# Altium PCB lab2_zasetskiy_buck.PcbDoc
Units mm, origin at the board's own origin, x right, y up, seen from the top; angles counter-clockwise.
Board outline 60 x 25 mm, 2 copper layers (Top Layer, Bottom Layer), stack 1.57 mm thick; 28 components, 15 nets, 77 pads, 137 vias.
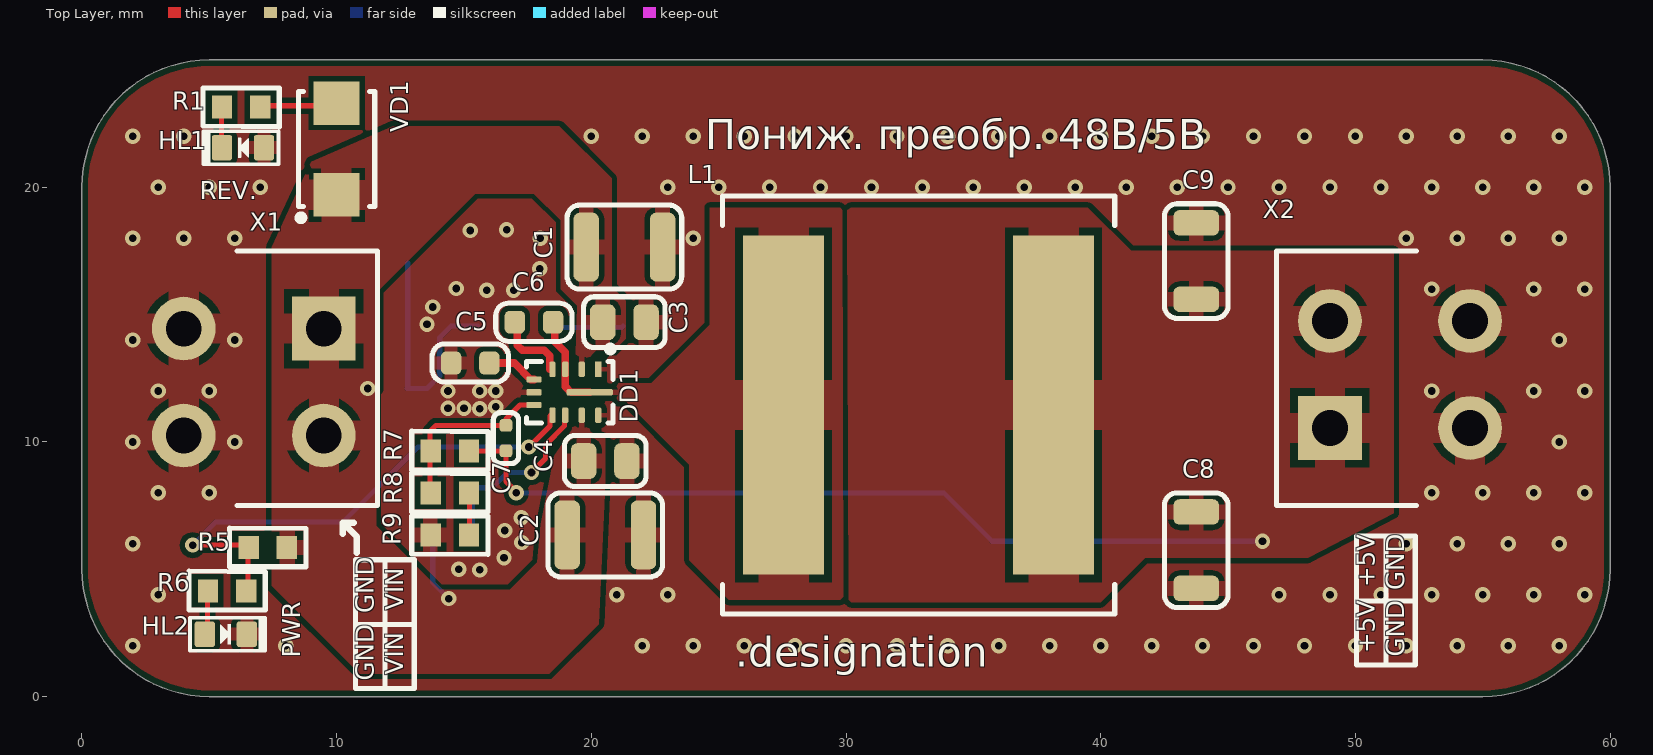
[diagram p0: Top Layer view]
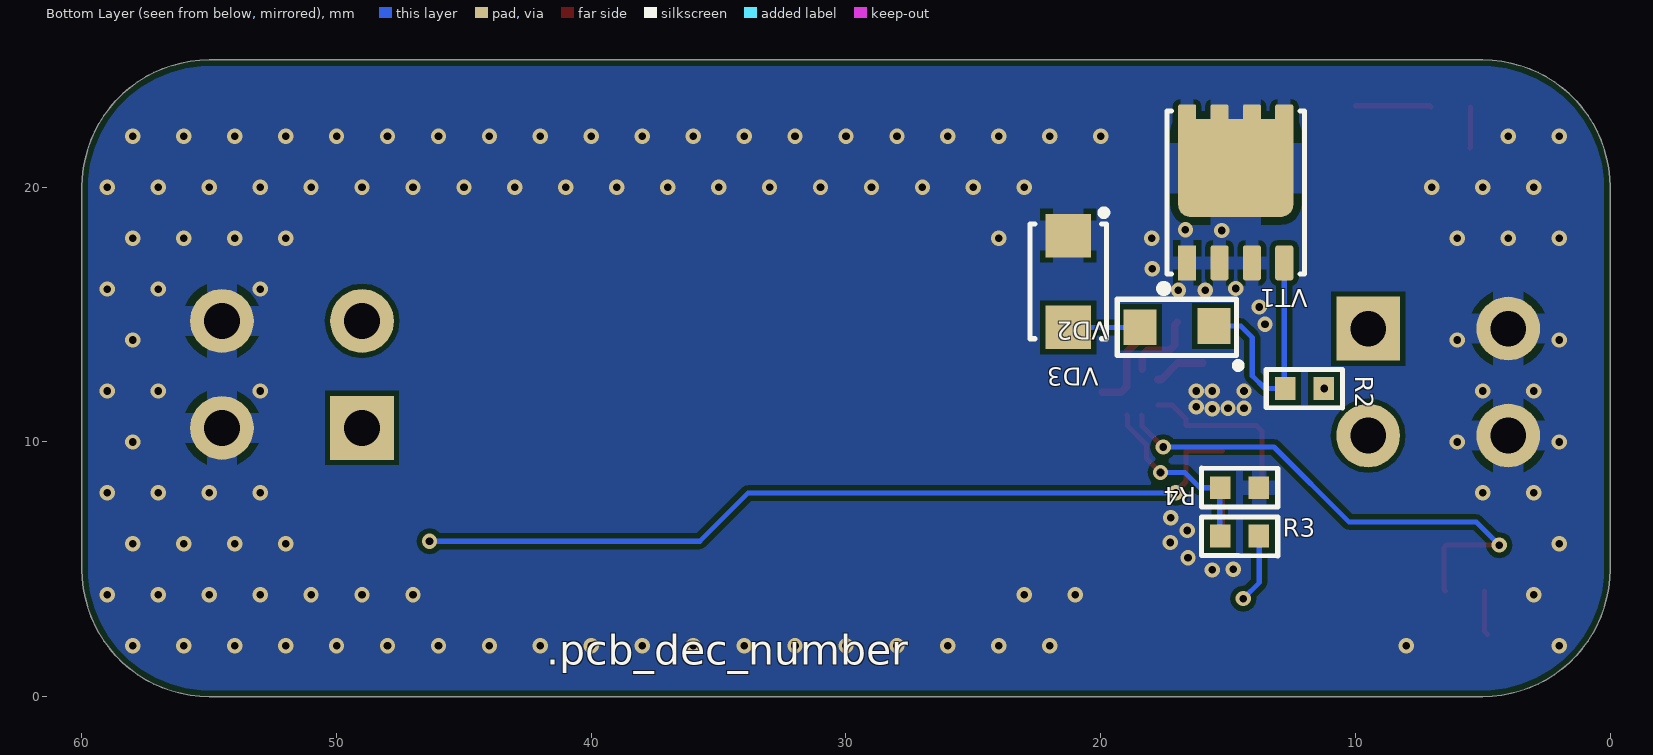
[diagram p1: Bottom Layer view, seen from below]
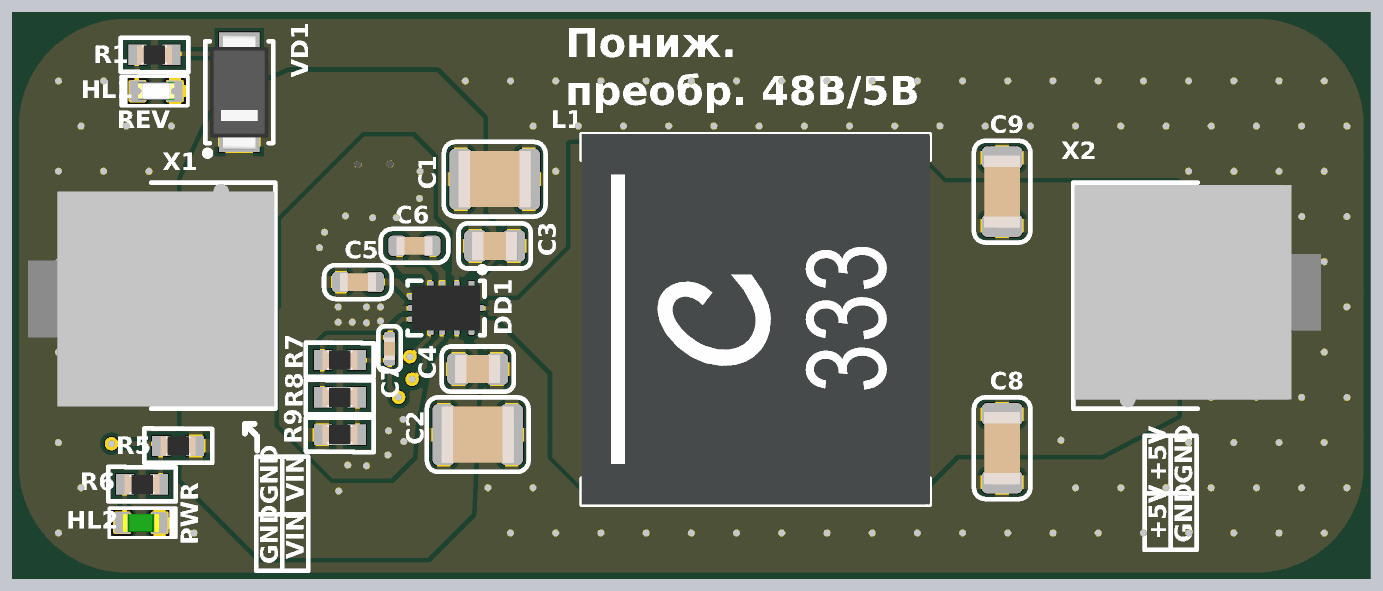
[diagram p2: 3D render of the assembled board from above, using the file's embedded part models]
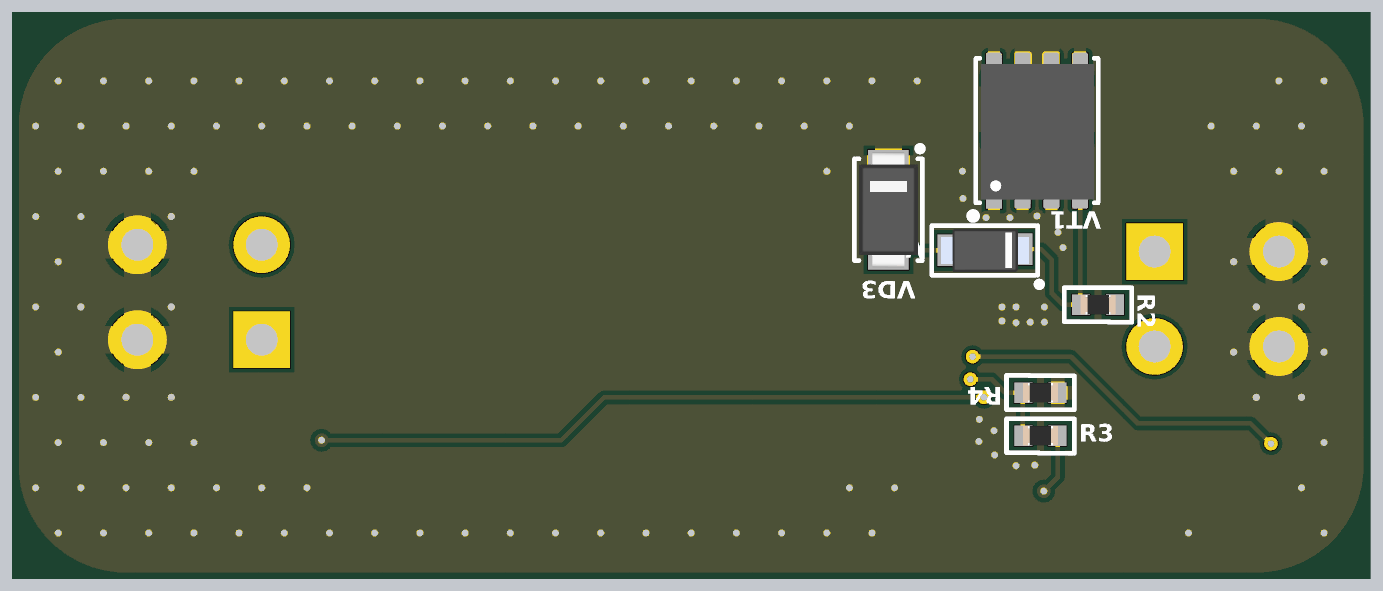
[diagram p3: 3D render of the assembled board from below, using the file's embedded part models]

## Layer stack, top to bottom
Top Solder: solder mask 0.0102, Solder Resist, Dk 3.5
Top Layer: signal copper 0.035
Core 1: core 1.5, FR4, Dk 4.6
Bottom Layer: signal copper 0.035
Bottom Solder: solder mask 0.0102, Solder Resist, Dk 3.5

## Board outline
0,5 0,20 cw(c5,20) 5,25 55,25 cw(c55,20) 60,20 60,5 cw(c55,5) 55,0 5,0 cw(c5,5)

## Design rules (kind name [scope] priority, off if disabled: settings)
AcuteAngle min_acute_angle [OnCopper] p1: minimum=3.50000000000000E+0001 checktracksonly=FALSE // Минимальный угол между примитивами топологии
BoardOutlineClearance board_outline_clearance_std [NOT (OnLayer('Bottom Overlay') OR OnLayer('Top Overlay'))] p1: gap=0.25 ignorepadtopadclearanceinfootprint=FALSE except(0: Arc-SplitContinuation Track-SplitContinuation SMDPad-SplitContinuation THPad-SplitContinuation Via-SplitContinuation Fill-SplitContinuation Poly-SplitContinuation Region-SplitContinuation Text-SplitContinuation) // Отступ элементов топологии от края фрезеруемой печатной платы
Clearance clearance_outer_35um_std [OnTopLayer OR OnBottomLayer] p1: gap=0.2 ignorepadtopadclearanceinfootprint=TRUE except(0.25: Arc-Hole Track-Hole SMDPad-Hole THPad-Hole Via-Hole Fill-Hole Poly-Hole Region-Hole Text-Hole) // Зазоры на внешних слоях
Clearance clearance_inner_35um_std [NOT (OnTopLayer Or OnBottomLayer)] p2: gap=0.2 ignorepadtopadclearanceinfootprint=FALSE except(0.25: Arc-Hole Track-Hole SMDPad-Hole THPad-Hole Via-Hole Fill-Hole Poly-Hole Region-Hole Text-Hole) // Зазоры на внутренних слоях
ComponentClearance [All] p1: gap=0 collisioncheckmode=3 verticalgap=0 showdistances=FALSE
DiffPairsRouting diff_pairs_routing [All] p1: maxlimit=0.127 minlimit=0.127 mostfreqgap=0.127 toplayer_minwidth=0.143 toplayer_maxwidth=0.143 toplayer_prefwidth=0.143 bottomlayer_minwidth=0.143 bottomlayer_maxwidth=0.143 bottomlayer_prefwidth=0.143 impedanceprofiledriven=TRUE impedanceprofileid={FD46899E-B5A2-4EF5-A302-5D2DB6A51F35} maxuncoupledlength=12.7 // Правила трассировки дифференциальных пар
HoleSize min_hole_size_std [IsPad] p1: absolutevalues=TRUE maxlimit=5.9 minlimit=0.6 maxpercent=80.000 minpercent=20.000 // Диаметр межслойного переходного отверстия
HoleSize min_hole_size_via_std [IsVia] p2: absolutevalues=TRUE maxlimit=5.9 minlimit=0.3 maxpercent=80.000 minpercent=20.000 // Минимальный диаметр монтажного отверстия
HoleToHoleClearance hole_to_hole_clearance_std [All] p1: gap=0.2 allowstackedmicrovias=FALSE // Минимальное расстояние между краями двух отверстий
MinimumAnnularRing min_via_ar_std [All] p1: minimumring=0.15 // Поясок площадки переходного отверстия (Annular ring VIA)
MinimumAnnularRing min_pad_ar_std [All] p2: minimumring=0.2 // Поясок монтажной контактной площадки (Annular ring PAD)
MinimumSolderMaskSliver min_solder_mask_bridge_std [All] p1: minsoldermaskwidth=0.15 // Мнимальная ширина масочного мостика
PlaneClearance plane_clearance_35um_std [All] p1: clearance=0.2 // Отступ полигона (для слоя plane) от элементов топологии
PlaneConnect [All] p1: planeconnectstyle=Relief reliefexpansion=0.5 reliefentries=4 reliefconductorwidth=0.2 reliefairgap=0.2
PolygonConnect poly_connect_to_pad<=0.3 [(AsMM(PadXSize_AllLayers)<=0.301) or (AsMM(PadYSize_AllLayers)<=0.301)] p1: thpad.connectstyle=Relief thpad.reliefconductorwidth=0.2 thpad.reliefentries=4 thpad.polygonreliefangle="90 Angle" thpad.airgapwidth=0.2 smdpad.connectstyle=Relief smdpad.reliefconductorwidth=0.2 smdpad.reliefentries=4 smdpad.polygonreliefangle="90 Angle" smdpad.airgapwidth=0.2 via.connectstyle=Direct via.reliefconductorwidth=0.254 via.reliefentries=4 via.polygonreliefangle="90 Angle" via.airgapwidth=0.254 // Правила подключения полигонов для падов от 0,3мм и меньше
PolygonConnect poly_connect_to_pad<=0.4 [(AsMM(PadXSize_AllLayers)<=0.401) or (AsMM(PadYSize_AllLayers)<=0.401)] p2: thpad.connectstyle=Relief thpad.reliefconductorwidth=0.26 thpad.reliefentries=4 thpad.polygonreliefangle="90 Angle" thpad.airgapwidth=0.2 smdpad.connectstyle=Relief smdpad.reliefconductorwidth=0.26 smdpad.reliefentries=4 smdpad.polygonreliefangle="90 Angle" smdpad.airgapwidth=0.2 via.connectstyle=Direct via.reliefconductorwidth=0.254 via.reliefentries=4 via.polygonreliefangle="90 Angle" via.airgapwidth=0.254 // Правила подключения полигонов для падов от 0,4 и меньше
PolygonConnect poly_connect_to_pad<=0.6 [(AsMM(PadXSize_AllLayers)<=0.601) or (AsMM(PadYSize_AllLayers)<=0.601)] p3: thpad.connectstyle=Relief thpad.reliefconductorwidth=0.33 thpad.reliefentries=4 thpad.polygonreliefangle="90 Angle" thpad.airgapwidth=0.2 smdpad.connectstyle=Relief smdpad.reliefconductorwidth=0.33 smdpad.reliefentries=4 smdpad.polygonreliefangle="90 Angle" smdpad.airgapwidth=0.2 via.connectstyle=Direct via.reliefconductorwidth=0.254 via.reliefentries=4 via.polygonreliefangle="90 Angle" via.airgapwidth=0.254 // Правила подключения полигонов для падов от 0,6мм и меньше
PolygonConnect poly_connect_to_pad<=0.7 [(AsMM(PadXSize_AllLayers)<=0.701) or (AsMM(PadYSize_AllLayers)<=0.701)] p4: thpad.connectstyle=Relief thpad.reliefconductorwidth=0.46 thpad.reliefentries=4 thpad.polygonreliefangle="90 Angle" thpad.airgapwidth=0.2 smdpad.connectstyle=Relief smdpad.reliefconductorwidth=0.46 smdpad.reliefentries=4 smdpad.polygonreliefangle="90 Angle" smdpad.airgapwidth=0.2 via.connectstyle=Direct via.reliefconductorwidth=0.254 via.reliefentries=4 via.polygonreliefangle="90 Angle" via.airgapwidth=0.254 // Правила подключения полигонов для падов от 0,7мм и меньше
PolygonConnect poly_connect_to_pad<=0.8 [(AsMM(PadXSize_AllLayers)<=0.8)or(AsMM(PadYSize_AllLayers)<=0.8)] p5: thpad.connectstyle=Relief thpad.reliefconductorwidth=0.53 thpad.reliefentries=4 thpad.polygonreliefangle="90 Angle" thpad.airgapwidth=0.3 smdpad.connectstyle=Relief smdpad.reliefconductorwidth=0.53 smdpad.reliefentries=4 smdpad.polygonreliefangle="90 Angle" smdpad.airgapwidth=0.2 via.connectstyle=Direct via.reliefconductorwidth=0.254 via.reliefentries=4 via.polygonreliefangle="90 Angle" via.airgapwidth=0.254 // Правила подключения полигонов для падов от 0,8мм и меньше
PolygonConnect poly_connect_to_pad<=1 [(AsMM(PadXSize_AllLayers)<=1.01)or(AsMM(PadYSize_AllLayers)<=1.01)] p6: thpad.connectstyle=Relief thpad.reliefconductorwidth=0.6 thpad.reliefentries=4 thpad.polygonreliefangle="90 Angle" thpad.airgapwidth=0.3 smdpad.connectstyle=Relief smdpad.reliefconductorwidth=0.6 smdpad.reliefentries=4 smdpad.polygonreliefangle="90 Angle" smdpad.airgapwidth=0.2 via.connectstyle=Direct via.reliefconductorwidth=0.254 via.reliefentries=4 via.polygonreliefangle="90 Angle" via.airgapwidth=0.254 // Правила подключения полигонов для падов от 1мм и меньше
PolygonConnect poly_connect_to_pad<=1.3 [(AsMM(PadXSize_AllLayers)<=1.31)or(AsMM(PadYSize_AllLayers)<=1.31)] p7: thpad.connectstyle=Relief thpad.reliefconductorwidth=0.66 thpad.reliefentries=4 thpad.polygonreliefangle="90 Angle" thpad.airgapwidth=0.3 smdpad.connectstyle=Relief smdpad.reliefconductorwidth=0.86 smdpad.reliefentries=4 smdpad.polygonreliefangle="90 Angle" smdpad.airgapwidth=0.2 via.connectstyle=Direct via.reliefconductorwidth=0.254 via.reliefentries=4 via.polygonreliefangle="90 Angle" via.airgapwidth=0.254 // Правила подключения полигонов для падов от 1,3мм и меньше
PolygonConnect poly_connect_to_pad<=1.6 [(AsMM(PadXSize_AllLayers)<=1.61)or(AsMM(PadYSize_AllLayers)<=1.61)] p8: thpad.connectstyle=Relief thpad.reliefconductorwidth=0.8 thpad.reliefentries=4 thpad.polygonreliefangle="90 Angle" thpad.airgapwidth=0.3 smdpad.connectstyle=Relief smdpad.reliefconductorwidth=1 smdpad.reliefentries=4 smdpad.polygonreliefangle="90 Angle" smdpad.airgapwidth=0.2 via.connectstyle=Direct via.reliefconductorwidth=0.254 via.reliefentries=4 via.polygonreliefangle="90 Angle" via.airgapwidth=0.254 // Правила подключения полигонов для падов от 1,6мм и меньше
PolygonConnect poly_connect_to_pad<=1.8 [(AsMM(PadXSize_AllLayers)<=1.8)or(AsMM(PadYSize_AllLayers)<=1.8)] p9: thpad.connectstyle=Relief thpad.reliefconductorwidth=1 thpad.reliefentries=4 thpad.polygonreliefangle="90 Angle" thpad.airgapwidth=0.3 smdpad.connectstyle=Relief smdpad.reliefconductorwidth=1.2 smdpad.reliefentries=4 smdpad.polygonreliefangle="90 Angle" smdpad.airgapwidth=0.2 via.connectstyle=Direct via.reliefconductorwidth=0.254 via.reliefentries=4 via.polygonreliefangle="90 Angle" via.airgapwidth=0.254 // Правила подключения полигонов для падов от 1,8мм и меньше
PolygonConnect poly_connect_to_pad<=2 [(AsMM(PadXSize_AllLayers)<=2.01)or(AsMM(PadYSize_AllLayers)<=2.01)] p10: thpad.connectstyle=Relief thpad.reliefconductorwidth=1.1 thpad.reliefentries=4 thpad.polygonreliefangle="90 Angle" thpad.airgapwidth=0.3 smdpad.connectstyle=Relief smdpad.reliefconductorwidth=1.4 smdpad.reliefentries=4 smdpad.polygonreliefangle="90 Angle" smdpad.airgapwidth=0.2 via.connectstyle=Direct via.reliefconductorwidth=0.254 via.reliefentries=4 via.polygonreliefangle="90 Angle" via.airgapwidth=0.254 // Правила подключения полигонов для падов от 2мм и меньше
PolygonConnect poly_connect_to_pad<=2.3 [(AsMM(PadXSize_AllLayers)<=2.31)or(AsMM(PadYSize_AllLayers)<=2.31)] p11: thpad.connectstyle=Relief thpad.reliefconductorwidth=1.2 thpad.reliefentries=4 thpad.polygonreliefangle="90 Angle" thpad.airgapwidth=0.3 smdpad.connectstyle=Relief smdpad.reliefconductorwidth=1.4 smdpad.reliefentries=4 smdpad.polygonreliefangle="90 Angle" smdpad.airgapwidth=0.2 via.connectstyle=Direct via.reliefconductorwidth=0.254 via.reliefentries=4 via.polygonreliefangle="90 Angle" via.airgapwidth=0.254 // Правила подключения полигонов для падов от 2,3мм и меньше
PolygonConnect poly_connect_to_pad<=2.5 [(AsMM(PadXSize_AllLayers)<=2.51)or(AsMM(PadYSize_AllLayers)<=2.51)] p12: thpad.connectstyle=Relief thpad.reliefconductorwidth=1.2 thpad.reliefentries=4 thpad.polygonreliefangle="90 Angle" thpad.airgapwidth=0.3 smdpad.connectstyle=Relief smdpad.reliefconductorwidth=1.4 smdpad.reliefentries=4 smdpad.polygonreliefangle="90 Angle" smdpad.airgapwidth=0.2 via.connectstyle=Direct via.reliefconductorwidth=0.254 via.reliefentries=4 via.polygonreliefangle="90 Angle" via.airgapwidth=0.254 // Правила подключения полигонов для падов от 2,5мм и меньше
PolygonConnect poly_connect_to_pad<=2.7 [(AsMM(PadXSize_AllLayers)<=2.71)or(AsMM(PadYSize_AllLayers)<=2.71)] p13: thpad.connectstyle=Relief thpad.reliefconductorwidth=1.4 thpad.reliefentries=4 thpad.polygonreliefangle="90 Angle" thpad.airgapwidth=0.3 smdpad.connectstyle=Relief smdpad.reliefconductorwidth=1.6 smdpad.reliefentries=4 smdpad.polygonreliefangle="90 Angle" smdpad.airgapwidth=0.2 via.connectstyle=Direct via.reliefconductorwidth=0.254 via.reliefentries=4 via.polygonreliefangle="90 Angle" via.airgapwidth=0.254 // Правила подключения полигонов для падов от 2,7мм и меньше
PolygonConnect poly_connect_to_pad<=3 [(AsMM(PadXSize_AllLayers)<=3.01)or(AsMM(PadYSize_AllLayers)<=3.01)] p14: thpad.connectstyle=Relief thpad.reliefconductorwidth=1.6 thpad.reliefentries=4 thpad.polygonreliefangle="90 Angle" thpad.airgapwidth=0.3 smdpad.connectstyle=Relief smdpad.reliefconductorwidth=1.8 smdpad.reliefentries=4 smdpad.polygonreliefangle="90 Angle" smdpad.airgapwidth=0.2 via.connectstyle=Direct via.reliefconductorwidth=0.254 via.reliefentries=4 via.polygonreliefangle="90 Angle" via.airgapwidth=0.254 // Правила подключения полигонов для падов от 3мм и меньше
PolygonConnect poly_connect_to_pad<=7 [(AsMM(PadXSize_AllLayers)<7.01)or(AsMM(PadYSize_AllLayers)<=7.01)] p15: thpad.connectstyle=Relief thpad.reliefconductorwidth=2 thpad.reliefentries=4 thpad.polygonreliefangle="90 Angle" thpad.airgapwidth=0.4 smdpad.connectstyle=Relief smdpad.reliefconductorwidth=2 smdpad.reliefentries=4 smdpad.polygonreliefangle="90 Angle" smdpad.airgapwidth=0.3 via.connectstyle=Direct via.reliefconductorwidth=0.254 via.reliefentries=4 via.polygonreliefangle="90 Angle" via.airgapwidth=0.254 // Правила подключения полигонов для падов от 7мм и меньше
PolygonConnect poly_connect_to_pad [All] p16: thpad.connectstyle=Relief thpad.reliefconductorwidth=0.25 thpad.reliefentries=4 thpad.polygonreliefangle="90 Angle" thpad.airgapwidth=0.2 smdpad.connectstyle=Relief smdpad.reliefconductorwidth=0.25 smdpad.reliefentries=4 smdpad.polygonreliefangle="90 Angle" smdpad.airgapwidth=0.2 via.connectstyle=Direct via.reliefconductorwidth=0.25 via.reliefentries=4 via.polygonreliefangle="90 Angle" via.airgapwidth=0.2 // Правила подключения полигонов общие
RoutingCorners [All] p1 off: cornerstyle=45-Degree minsetback=2.5 maxsetback=2.5
RoutingVias [All] p1: holewidth=0.3 width=0.6 viastyle="Through Hole" minholewidth=0.3 minwidth=0.6 maxholewidth=5.9 maxwidth=6.4
SilkToSilkClearance silk_to_silk_clearance_std [All] p1 off: silktosilkclearance=0.15 // Отступ текста шелкографии от других примитивов шелкографии
SilkToSolderMaskClearance silk_to_solder_mask_clearance_std [IsPad] p1 off: minsilkscreentomaskgap=0.15 clearancetoexposedcopper=FALSE // Минимальное расстояние между элементами шелкографии и вскрытой медью
SolderMaskExpansion solder_mask_expansion_std [All] p1: expansion=0.05 // Припуск паяльной масски
UnRoutedNet [All] p1: checkbadconnections=TRUE
Width width_35um_std [All] p1: maxlimit=10 minlimit=0.2 preferedwidth=0.2 checkconnectedcopper=TRUE // Ширина проводников (общая)
19 further rules are at their usual default settings.

## Components (designator, comment, footprint, x,y, rotation, side; value= is the part's Value field where it differs from the comment)
C1 "4,7 мк" C1210 21.3,17.65 r0 top
C2 "4,7 мк" C1210 20.55,6.35 r0 top
C3 "0,22 мк" C0805 21.3,14.7 r0 top
C4 "0,22 мк" C0805 20.55,9.25 r0 top
C5 "1 мк" C0603 15.25,13.1 r180 top
C6 "0,1 мк" C0603 17.75,14.7 r180 top
C7 "27" C0402 16.65,10.15 r90 top
C8 "22 мк" C1206 43.75,5.75 r270 top
C9 "22 мк" C1206 43.75,17.1 r90 top
DD1 "LMR36015FSCQRNXRQ1" VQFN-HR-12 19.15,11.95 r270 top
HL1 "VLMB1300-GS08" LED 6.325,21.55 r180 top
HL2 "TLMG1100-GS08" LED_GREEN 5.65,2.45 r0 top
L1 "XAL1510-682MEB" XAL-2-1620X1520X1100 32.85,11.45 r0 top
R1 "4,3 к" R0603 6.25,23.15 r0 top
R2 "2,2 к" R0603 12,12.1 r180 bottom
R3 "330 к" R0603 14.55,6.3 r180 bottom
R4 "10,2 к" R0603 14.55,8.2 r0 bottom
R5 "100 к" R0603 7.3,5.85 r180 top
R6 "2,4 к" R0603 5.7,4.15 r180 top
R7 "100 к" R0603 14.45,9.65 r180 top
R8 "12 к" R0603 14.45,8 r180 top
R9 "13 к" R0603 14.45,6.35 r0 top
VD1 "SL13-E3/5AT" DO-214AC 10,21.5 r90 top
VD2 "BZD17C47P" DO-219AB 17,14.5 r0 bottom
VD3 "SL13-E3/5AT" DO-214AC 21.275,16.3 r270 bottom
VT1 "CSD19532Q5B" SON-8 14.7,19.8 r180 bottom
X1 "4-1775099-0" 4-1775099-0 6.1,12.5 r270 top
X2 "4-1775099-0" 4-1775099-0 52.4,12.5 r90 top

## Footprints (in the part's own frame and the unit in brackets; to place one, negate y for a bottom-side part, rotate by r counter-clockwise, add the part's x,y. Pads: shape width x height; smd on the part's side, far side on the other; paste and mask are expansions set on the pad)
4-1775099-0 [mm]
  rect 2.5x2.5 hole 1.4: 1(-1.95,3.4)
  round 2.5 hole 1.4: 2(2.25,3.4) 3(-1.95,-2.1) 4(2.25,-2.1)
  silkscreen extent -5,0 5,5.5, body extent -4.95,-5.45 4.9,5.45, height 12.8
C0402 [mm] "Chip Capacitor, 2-Leads, Body 1,00x0,50mm, IPC Medium Density"
  rrect50% 0.5x0.5 smd: 1(-0.5,0) 2(0.5,0)
  silkscreen extent -1,-0.5 1,0.5, body extent -0.5,-0.25 0.5,0.25, height 0.5
C0603 [mm] "Chip Capacitor, 2-Leads, Body 1,60x0,80mm, IPC Medium Density"
  rrect50% 0.8x0.9 smd: 1(-0.75,0) 2(0.75,0)
  silkscreen extent -1.5,-0.75 1.5,0.75, body extent -0.8,-0.4 0.8,0.4, height 0.8
C0805 [mm] "Chip Capasitor, 2-Leads, Body 2,00x1,25mm, IPC Medium Density"
  rrect50% 1x1.4 smd: 1(-0.85,0) 2(0.85,0)
  silkscreen extent -1.6,-1 1.6,1, body extent -1,-0.62 1,0.63, height 0.6
C1206 [mm] "Chip Capacitor, 2-Leads, Body 3,20x1,60mm, IPC Medium Density"
  rrect50% 1x1.8 smd: 1(-1.5,0) 2(1.5,0)
  silkscreen extent -2.25,-1.25 2.25,1.25, body extent -1.6,-0.8 1.6,0.8, height 0.78
C1210 [mm] "Chip Capacitor, 2-Leads, Body 3,20x2,50mm, IPC Medium Density"
  rrect50% 1x2.7 smd: 1(-1.5,0) 2(1.5,0)
  silkscreen extent -2.25,-1.65 2.25,1.65, body extent -1.6,-1.25 1.6,1.25, height 0.78
DO-214AC [mm] "Molded Diode, 2-Leads, Body 4,25x2,67mm, IPC Medium Density"
  rect 1.7x1.8 smd: 1(-1.8,0) 2(1.8,0)
  silkscreen extent -2.82,-1.5 2.25,1.52, body extent -2.55,-1.3 2.55,1.3, height 2.26
DO-219AB [mm]
  rect 1.3x1.4 smd: 1(-1.45,-0.05) 2(1.45,0)
  silkscreen extent -2.45,-1.1 2.35,1.55, body extent -1.95,-0.95 1.95,0.95, height 1.25
LED [mm] "LED"
  rrect25% 0.8x1 smd paste-10 mask+0.1: 1(-0.825,0) 2(0.825,0)
  silkscreen extent -1.4,-0.65 1.55,0.65, body extent -0.81,-0.4 0.81,0.4, height 0.6
LED_GREEN [mm] "Green LED"
  rrect25% 0.8x1 smd paste-10 mask+0.1: 1(-0.825,0) 2(0.825,0)
  silkscreen extent -1.4,-0.65 1.55,0.65, body extent -0.8,-0.4 0.8,0.4, height 0.8
R0603 [mm] "Chip Resistor, 2-Leads, Body 1,60x0,80mm, IPC Medium Density"
  rect 0.8x0.9 smd: 1(-0.75,0) 2(0.75,0)
  silkscreen extent -1.5,-0.77 1.5,0.75, body extent -0.77,-0.43 0.78,0.43, height 0.43
SON-8 [mm]
  rrect25% 0.71x1.372 smd paste-10: D(-1.905,2.77) D(-0.635,2.77) D(0.635,2.77) D(1.905,2.77)
  rrect25% 4.52x3.85 smd paste-10: D(0,0.95)
  rrect25% 0.71x1.372 smd paste-0.002: G(1.905,-2.77) S(-0.635,-2.77) S(0.635,-2.77)
  rect 0.71x1.372 smd paste-0.002: S(-1.905,-2.77)
  silkscreen extent -2.83,-3.78 2.7,3.2, body extent -2.48,-3.06 2.52,2.94, height 1.05
VQFN-HR-12 [mm]
  rect 0.6x0.25 smd: 1(-0.9,1.125)
  rrect50% 0.6x0.25 smd: 2(-0.9,0.475) 3(-0.9,-0.175) 4(-0.9,-0.675) 8(0.9,-0.675) 9(0.9,-0.175) 10(0.9,0.475) 11(0.9,1.125)
  rrect50% 0.25x0.6 smd: 5(-0.5,-1.4) 6(0,-1.4) 7(0.5,-1.4)
  rrect50% 0.25x1.825 smd: 12(0,0.789)
  silkscreen extent -1.82,-1.7 1.2,1.73, body extent -1,-1.5 1,1.5, height 1
XAL-2-1620X1520X1100 [mm] "Precision Wire Wound Inductor, 2-Leads, Body 16,20x15,20mm, IPC Medium Density"
  rect 3.18x13.3 smd: 1(-5.3,0) 2(5.3,0)
  silkscreen extent -7.7,-8.2 7.7,8.2, body extent -7.7,-8.2 7.7,8.2, height 10.7

## Part data
C1 C2: library part c0119, "=Описание", HelpURL=http://product.samsungsem.com/mlcc/CL32B475KCIZNW.do, ID=c0119, Корпус=1210, Наименование=CL32B475KCIZNWE, Напряжение="100 В", Номинал="4,7 мк", Номинальное напряжение="100 В", Описание="Конденсатор чип 1210 4,7 мкФ 100 В ±10 %", Отклонение="±10 %", Производитель="Samsung electro-mechanics", Рабочие температуры="от –55 °С до +125 °С", Температурный коэффициент емкости=X7R, Фамилия=Засецкий
C3 C4: library part c0120, "=Описание", HelpURL=http://product.samsungsem.com/mlcc/CL21B224KCFSFN.do, ID=c0120, Корпус=0805, Наименование=CL21B224KCFSFNE, Напряжение="100 В", Номинал="0,22 мк", Номинальное напряжение="100 В", Описание="Конденсатор чип 0805 0,22 мкФ 100 В ±10 %", Отклонение="±10 %", Производитель="Samsung electro-mechanics", Рабочие температуры="от –55 °С до +125 °С", Температурный коэффициент емкости=X7R, Фамилия=Засецкий
C5: library part c0063, "=Описание", HelpURL=https://www.yageo.com/upload/media/product/products/datasheet/mlcc/UPY-GPHC_X7R_6.3V-to-50V_20.pdf, ID=c0063, Корпус=0603, Наименование=CC0603KRX7R7BB105, Напряжение="16 В", Номинал="1 мк", Номинальное напряжение="16 В", Описание="Конденсатор чип 0603 1 мкФ 16 В ±10 %", Отклонение="±10 %", Производитель="YAGEO Corp.", Рабочие температуры="от –55 °С до +125 °С", Температурный коэффициент емкости=X7R, Фамилия=Паньков
C6: library part c0033, "=Описание", HelpURL=https://www.yageo.com/upload/media/product/products/datasheet/mlcc/UPY-GPHC_X7R_6.3V-to-50V_20.pdf, ID=c0033, Корпус=0603, Наименование=CC0603KRX7R8BB104, Напряжение="25 В", Номинал="0,1 мк", Номинальное напряжение="25 В", Описание="Конденсатор чип 0603 100 нФ 25 В ±10 %", Отклонение="±10 %", Производитель="YAGEO Corp.", Рабочие температуры="от –55 °С до +125 °С", Температурный коэффициент емкости=X7R, Фамилия=Паньков
C7: library part c0001, "=Описание", HelpURL=http://product.samsungsem.com/mlcc/CL05C270JB5NNN.do, ID=c0001, Корпус=0402, Наименование=CL05C270JB5NNNC, Напряжение="50 В", Номинал=27, Номинальное напряжение="50 В", Описание="Конденсатор чип 0402 27 пФ 50 В ±5 %", Отклонение="±5 %", Производитель="Samsung electro-mechanics", Рабочие температуры="от –55 °С до +125 °С", Температурный коэффициент емкости=C0G, Фамилия=Соколов
C8 C9: library part c0102, "=Описание", HelpURL=https://www.yageo.com/upload/media/product/productsearch/datasheet/mlcc/UPY-GPHC_X7R_6.3V-to-50V_20.pdf, ID=c0102, Корпус=1206, Наименование=CC1206KRX7R6BB226, Напряжение="10 В", Номинал="22 мк", Номинальное напряжение="10 В", Описание="Конденсатор чип 0603 22 мкФ 10 В ±10 %", Отклонение="±10 %", Производитель="YAGEO Corp.", Рабочие температуры="от –55 °С до +125 °С", Температурный коэффициент емкости=X7R, Фамилия=Паньков
DD1: library part dd0011, "=Описание", HelpURL=https://www.ti.com/product/LMR36015-Q1, ID=dd0011, Входное напряжение="от 4,2 В до 60 В", Выходное напряжение="от 1 В до 58 В", Коммутируемый ток="до 1,5 А", Корпус=VQFN-HR-12, Наименование=LMR36015FSCQRNXRQ1, Описание="Понижающий преобразователь напряжения 60 В и 1,5 А", Производитель="Texas Instruments", Рабочие температуры="от –40 °С до +150 °С", Фамилия=Засецкий, Частота переключения="от 400 кГц до 2,1 МГц"
HL1: library part hl0003, "=Описание", HelpURL=https://www.vishay.com/docs/82437/vlmo1300.pdf, ID=hl0003, Корпус=0603, Наименование=VLMB1300-GS08, Номинальный ток="20 мА", Описание="Светодиод синий чип 0603", Примечание=Синий, Производитель=Vishay, Рабочие температуры="от -35 °С до +85 °С", Фамилия=Засецкий
HL2: library part hl0002, "=Описание", HelpURL=https://www.vishay.com/docs/83173/tlmb1100.pdf, ID=hl0002, Корпус=0603, Наименование=TLMG1100-GS08, Номинальный ток="30 мА", Описание="Светодиод зелёный чип 0603", Примечание=Зелёный, Производитель=Vishay, Рабочие температуры="от -40 °С до +100 °С", Фамилия=Засецкий
L1: library part l0002, "=Описание", HelpURL=https://www.coilcraft.com/en-us/products/power/shielded-inductors/molded-inductor/xal/xal1510, ID=l0002, Индуктивность="6,8 мкГн", Корпус="16,2 x 15,2 x 11", Максимальное активное сопротивление="4,6 мОм", Наименование=XAL1510-682MEB, Номинал="6,8 мкГн", Номинальное активное сопротивление="4,17 мОм", Номинальный ток (при нагреве на 20 °С/40 °С)="19 А", Описание="Катушка индуктивности 6,8 мкГн ±20 %", Отклонение="±20 %", Производитель="Coilcraft, Inc.", Рабочее напряжение="от 0 В до 60 В", Рабочие температуры="от –40 °С до +125 °С", Резонансная частота="11,5 МГц", Ток насыщения="36 А", Фамилия=Засецкий
R1: library part r0047, "=Описание", HelpURL=https://www.yageo.com/upload/media/product/productsearch/datasheet/rchip/PYu-RC_Group_51_RoHS_L_11.pdf, ID=r0047, Корпус=0603, Наименование=RC0603FR-074K3L, Номинал="4,3 к", Номинальное напряжение="75 В", Номинальный ток="1 А", Описание="Резистор чип 0603 4,3 кОм ±1 % 0,1 Вт", Отклонение="±1 %", Примечание="Ряд E24", Производитель="YAGEO Corp.", Рабочие температуры="от –55 °С до +155 °С", Фамилия=Паньков
R2: library part r0040, "=Описание", HelpURL=https://www.yageo.com/upload/media/product/productsearch/datasheet/rchip/PYu-RC_Group_51_RoHS_L_11.pdf, ID=r0040, Корпус=0603, Наименование=RC0603FR-072K2L, Номинал="2,2 к", Номинальное напряжение="75 В", Номинальный ток="1 А", Описание="Резистор чип 0603 2,2 кОм ±1 % 0,1 Вт", Отклонение="±1 %", Примечание="Ряд E24", Производитель="YAGEO Corp.", Рабочие температуры="от –55 °С до +155 °С", Фамилия=Паньков
R3: library part r0113, "=Описание", HelpURL=https://www.yageo.com/upload/media/product/productsearch/datasheet/rchip/PYu-RC_Group_51_RoHS_L_11.pdf, ID=r0113, Корпус=0603, Наименование=RC0603FR-07330KL, Номинал="330 к", Номинальное напряжение="75 В", Номинальный ток="1 А", Описание="Резистор чип 0603 330 кОм ±1 % 0,1 Вт", Отклонение="±1 %", Примечание="Ряд E24", Производитель="YAGEO Corp.", Рабочие температуры="от –55 °С до +155 °С", Фамилия=Паньков
R4: library part r0061, "=Описание", HelpURL=https://www.yageo.com/upload/media/product/productsearch/datasheet/rchip/PYu-RC_Group_51_RoHS_L_11.pdf, ID=r0061, Корпус=0603, Наименование=RC0603FR-0710K2L, Номинал="10,2 к", Номинальное напряжение="75 В", Номинальный ток="1 А", Описание="Резистор чип 0603 10,2 кОм ±1 % 0,1 Вт", Отклонение="±1 %", Примечание="Ряд E24", Производитель="YAGEO Corp.", Рабочие температуры="от –55 °С до +155 °С", Фамилия=Жернаков
R5 R7: library part r0094, "=Описание", HelpURL=https://www.yageo.com/upload/media/product/productsearch/datasheet/rchip/PYu-RC_Group_51_RoHS_L_11.pdf, ID=r0094, Корпус=0603, Наименование=RC0603FR-07100KL, Номинал="100 к", Номинальное напряжение="75 В", Номинальный ток="1 А", Описание="Резистор чип 0603 100 кОм ±1 % 0,1 Вт", Отклонение="±1 %", Примечание="Ряд E24", Производитель="YAGEO Corp.", Рабочие температуры="от –55 °С до +155 °С", Фамилия=Водорезов
R6: library part r0041, "=Описание", HelpURL=https://www.yageo.com/upload/media/product/productsearch/datasheet/rchip/PYu-RC_Group_51_RoHS_L_11.pdf, ID=r0041, Корпус=0603, Наименование=RC0603FR-072K4L, Номинал="2,4 к", Номинальное напряжение="75 В", Номинальный ток="1 А", Описание="Резистор чип 0603 2,4 кОм ±1 % 0,1 Вт", Отклонение="±1 %", Примечание="Ряд E24", Производитель="YAGEO Corp.", Рабочие температуры="от –55 °С до +155 °С", Фамилия=Паньков
R8: library part r0063, "=Описание", HelpURL=https://www.yageo.com/upload/media/product/productsearch/datasheet/rchip/PYu-RC_Group_51_RoHS_L_11.pdf, ID=r0063, Корпус=0603, Наименование=RC0603FR-0712KL, Номинал="12 к", Номинальное напряжение="75 В", Номинальный ток="1 А", Описание="Резистор чип 0603 12 кОм ±1 % 0,1 Вт", Отклонение="±1 %", Примечание="Ряд E24", Производитель="YAGEO Corp.", Рабочие температуры="от –55 °С до +155 °С", Фамилия=Паньков
R9: library part r0065, "=Описание", HelpURL=https://www.yageo.com/upload/media/product/productsearch/datasheet/rchip/PYu-RC_Group_51_RoHS_L_11.pdf, ID=r0065, Корпус=0603, Наименование=RC0603FR-0713KL, Номинал="13 к", Номинальное напряжение="75 В", Номинальный ток="1 А", Описание="Резистор чип 0603 13 кОм ±1 % 0,1 Вт", Отклонение="±1 %", Примечание="Ряд E24", Производитель="YAGEO Corp.", Рабочие температуры="от –55 °С до +155 °С", Фамилия=Жернаков
VD1 VD3: library part vd0002, "=Описание", HelpURL=https://www.vishay.com/product?docid=88740, ID=vd0002, Импульсное обратное напряжение="30 В", Корпус=DO-214AC, Макс допустимый средний прямой ток="1,5 А", Наименование=SL13-E3/5AT, Описание="Диод Шоттки 30 В 1,5 А", Пиковое прямое напряжение="0,445 В", Производитель="Vishay Intertechnology, Inc.", Рабочие температуры="от –55 °С до +125 °С", Фамилия=Ларионов
VD2: library part vd0028, "=Описание", HelpURL=https://www.vishay.com/product?docid=85161, ID=vd0028, Корпус=DO-219AB, Наименование=BZD17C47P, Номинальное напряжение стабилизации="47 В", Номинальный ток стабилизации="10 мА", Описание="Стабилитрон 47 В", Производитель="Vishay Intertechnology, Inc.", Рабочие температуры="от –55 °С до +150 °С", Разброс напряжения стабилизации="44,0...50,0 В", Фамилия=Паньков
VT1: library part vt0001, "=Описание", HelpURL=https://www.ti.com/product/CSD19532Q5B, ID=vt0001, Корпус=SON-8, Наименование=CSD19532Q5B, Напряжение затвор — исток="±20 В", Напряжение сток — исток="100 В", Описание="Транзистор полевой N-канальный 100 В 17 А", Производитель="Texas Instruments", Рабочие температуры="от –55 °С до +150 °С", Сопротивление сток — исток="0,0057 Ом", Ток стока="17 А", Фамилия=Жернаков
X1 X2: library part x0004, "=Описание", Contact_3=GND, Contact_4=GND, HelpURL=https://www.te.com/usa-en/product-4-1775099-0.html, ID=x0004, Наименование=4-1775099-0, Описание="ATX Power 4 pin гнездо прямой", Производитель="TE Connectivity", Фамилия=Ларионов
  X1: Contact_1=VIN, Contact_2=VIN
  X2: Contact_1=+5В, Contact_2=+5В

## Via types
v1: diameter 0.6, hole 0.3, Top Layer to Bottom Layer, tented both sides, 132 vias
v2: diameter 0.6, hole 0.3, Top Layer to Bottom Layer, 5 vias

## Nets (pads, with @x,y where several pads share a name; then routed paths per layer and width w, separated by ;. In a path a pad name is that pad's centre, name@x,y a point inside that pad or via, vN(x,y) a via of type N, cw(c..) or ccw(c..) an arc to the next point about the centre after c; other vN are vias at no path point)
+5В: C7.1 C8.1 C9.1 L1.2 R7.1 X2.1 X2.2 | length 33.3
  Top Layer w0.2: R7.1@15.225,9.65 C7.1 16.65,8.449 17.05,8.049 v2(17.05,8)
  Bottom Layer w0.2: v2(17.05,8) 33.838,8 35.738,6.1 v1(46.35,6.1)
BOOT: C6.2 DD1.4 | length 2.9
  Top Layer w0.3: C6.2 17.1,14.6 17.1,13.8 17.3,13.6 18.15,13.6 18.375,13.375 DD1.4@18.375,12.85
EN: DD1.9 R3.1 R4.2 | length 7.3
  Top Layer w0.2: v2(17.65,8.8) 18.2,9.35 18.2,9.884 18.95,10.634 18.95,11.025 DD1.9
  Bottom Layer w0.2: R3.1@15.325,6.3 15.325,8.2 16.1,8.2 16.7,8.8 v2(17.65,8.8)
FB: C7.2 DD1.7 R7.2 R8.2 | length 7.1
  Top Layer w0.2: R8.2@13.675,8 13.675,9.65 13.675,10.425 13.9,10.65 C7.2 16.65,10.9 17.2,11.45 DD1.7
GND: C1.2 C2.2 C3.2 C4.2 C5.2 C8.2 C9.2 DD1.1 DD1.6 DD1.11 HL1.1 HL2.2 R4.1 R9.1 VD3.1 VT1.D VT1.S X1.3 X1.4 X2.3 X2.4
  other v1: 2,2 8,2 22,2 24,2 26,2 28,2 30,2 32,2 34,2 36,2 38,2 40,2 42,2 44,2 46,2 48,2 50,2 52,2 54,2 56,2 58,2 3,4 21,4 23,4 47,4 49,4 51,4 53,4 55,4 57,4 59,4 15.625,4.975 14.8,5 16.575,5.45 2,6 52,6 54,6 56,6 58,6 17.275,6.05 16.6,6.525 17.25,7.025 3,8 5,8 53,8 55,8 57,8 59,8 2,10 6,10 58,10 15.625,11.3 14.375,11.325 15,11.325 16.25,11.375 3,12 5,12 14.375,12 15.625,12 16.25,12 53,12 57,12 59,12 2,14 6,14 58,14 13.55,14.625 13.775,15.3 15.9,15.95 16.95,15.95 53,16 57,16 59,16 14.7,16.025 17.975,16.8 2,18 4,18 6,18 18,18 24,18 52,18 54,18 56,18 58,18 15.25,18.3 16.675,18.325 3,20 5,20 7,20 23,20 25,20 27,20 29,20 31,20 33,20 35,20 37,20 39,20 41,20 43,20 45,20 47,20 49,20 51,20 53,20 55,20 57,20 59,20 2,22 4,22 20,22 22,22 24,22 26,22 28,22 30,22 32,22 34,22 36,22 38,22 40,22 42,22 44,22 46,22 48,22 50,22 52,22 54,22 56,22 58,22
NetHL1_2: HL1.2 R1.1 | length 1.6
  Top Layer w0.2: R1.1@5.475,23.15 5.475,21.575 HL1.2
NetHL2_1: HL2.1 R6.2 | length 1.7
  Top Layer w0.2: HL2.1 4.925,2.55 R6.2@4.925,4.15
NetR1_2: R1.2 VD1.2 | length 3
  Top Layer w0.2: R1.2@7.025,23.15 7.075,23.2 VD1.2@10,23.2
NetR2_1: R2.1 VD2.1 VT1.G | length 9.6
  Bottom Layer w0.2: VT1.G 12.795,12.12 12.775,12.1 13.55,12.1 14.05,12.6 14.05,14.1 14.5,14.55 VD2.1
NetR8_1: R8.1 R9.2 | length 1.6
  Top Layer w0.2: R9.2@15.225,6.35 R8.1@15.225,8
NetVD2_2: VD2.2 VD3.2 | length 2.8
  Bottom Layer w0.2: VD2.2 21.2,14.5 VD3.2@21.25,14.55
PGOOD: DD1.8 R5.2 R6.1 | length 20.3
  Top Layer w0.2: v2(4.35,5.95) 6.425,5.95 6.525,5.85 6.525,4.2 R6.1@6.475,4.15 ; v2(17.55,9.8) 18.375,10.625 18.375,11.025 DD1.8@18.4,11.05
  Bottom Layer w0.2: v2(4.35,5.95) 5.25,6.85 10.246,6.85 13.196,9.8 v2(17.55,9.8)
SW: C6.1 DD1.3 DD1.12 L1.1 | length 3.8
  Top Layer w0.3: C6.1 18.571,14.629 18.571,13.929 18.975,13.525 DD1.3 18.975,12.177 19.201,11.95 DD1.12
VCC: C5.1 DD1.5 | length 2
  Top Layer w0.3: C5.1 16.975,13.1 17.625,12.45 DD1.5
VIN: C1.1 C2.1 C3.1 C4.1 DD1.2 DD1.10 R2.2 R3.2 R5.1 VD1.1 X1.1 X1.2 | length 2.7
  Bottom Layer w0.2: R3.2@13.775,6.3 13.775,4.475 v1(14.4,3.85)
  other v2: 11.225,12.1

## Polygon pours and split planes (outlines as drawn)
GND on Top Layer "Top Layer-GND" (solid, pour order 20): 0,25 60,25 60,0 0,0
SW on Top Layer "Top Layer-SW" (solid, pour order 18): 19.4,11.6 21.35,11.6 23.85,9.1 23.85,5.35 25.4,3.8 30.1,3.8 30.1,19.044 29.944,19.2 24.65,19.2 24.65,14.6 22.35,12.3 19.4,12.3
+5В on Top Layer "Top Layer-+5В" (solid, pour order 12): 30.05,19.25 30.1,19.2 39.5,19.2 41.2,17.5 51.5,17.5 51.5,7.2 48.15,5.45 41.75,5.45 40,3.7 30.2,3.7 30.1,3.8
VIN on Top Layer "Top Layer-VIN" (solid, pour order 6): 11.55,11.95 11.55,6.7 14.05,4.2 16.8,4.2 17.4,4.8 17.875,5.275 18.012,6.762 18.55,9.45 19.25,10.5 19.25,11.45 19.85,11.45 19.95,10.4 20.487,10.151 20.55,10.15 20.55,8.4 20.3,2.85 18.35,0.9 10.85,0.9 10.85,0.95 7.45,4.35 7.45,11.95
VIN on Top Layer "Top Layer-VIN 1" (solid, pour order 10): 11.55,11.95 11.65,12.05 11.65,15.95 15.45,19.75 17.75,19.75 18.8,18.7 18.8,16 19.45,15.35 19.39,13.195 19.15,12.775 19.15,12.55 19.4,12.3 19.7,12.3 19.95,12.55 19.95,13.35 20.2,13.6 20.9,13.6 21.35,14.05 21.35,15.55 20.8,16.1 20.8,20.35 18.75,22.4 12.2,22.4 9,21 7.45,17.65 7.45,11.95
GND on Bottom Layer "Bottom Layer-GND" (solid, pour order 22): 0,25 60,25 60,0 0,0

## Silkscreen, mask and mechanical layers (free items; w line width, h text height)
Top Overlay:
  lines w0.2: 10.75,2.875 10.75,5.375 13.05,5.375 ; 11.9,0.325 11.9,2.825 ; 11.9,2.875 11.9,5.375 ; 13.05,2.775 13.05,0.325 10.75,0.325 10.75,2.825 13.05,2.825 ; 13.05,2.875 13.05,5.325 ; 50.05,3.8 50.05,6.3 52.35,6.3 ; 51.2,1.25 51.2,3.75 ; 51.2,3.8 51.2,6.3 ; 52.35,3.7 52.35,1.25 50.05,1.25 50.05,3.75 52.35,3.75 ; 52.35,3.8 52.35,6.25
  lines w0.254: 10.25,6.4 10.25,6.825 ; 10.675,6.825 10.25,6.825 ; 10.8,5.65 10.8,6.275 10.25,6.825
  text "Пониж. преобр. 48В/5В" at 24.475,21.1 h2
  text "REV." at 4.625,19.3 h1.2
  text "+5V" at 51,4.3 h1.2 r90
  text "GND" at 52.15,4.175 h1.2 r90
  text "VIN" at 12.85,3.4 h1.2 r90
  text "GND" at 11.7,3.275 h1.2 r90
  text "+5V" at 51,1.7 h1.2 r90
  text "GND" at 52.15,1.575 h1.2 r90
  text "PWR" at 8.8,1.525 h1.2 r90
  text "VIN" at 12.85,0.85 h1.2 r90
  text ".designation" at 25.65,0.775 h2
  text "GND" at 11.7,0.625 h1.2 r90
Bottom Overlay:
  text ".pcb_dec_number" at 41.775,0.85 h2
Board:
  the board outline again, w0.1
Assembly Notes (Mech5):
  text "'.title'" at 0,-2.5 h2
  text "'.project'_'.pcb_dec_number'['.Pcb_File_Name_No_Path']" at 0,-5 h2